# Altium PCB PCB1_V2.PcbDoc
Units mm, origin at the board's own origin, x right, y up, seen from the top; angles counter-clockwise.
Board outline 152.4 x 101.6 mm, 2 copper layers (Top Layer, Bottom Layer); 82 components, 54 nets, 386 pads, 0 vias.
Unrouted connection lines stored in the file: 212.
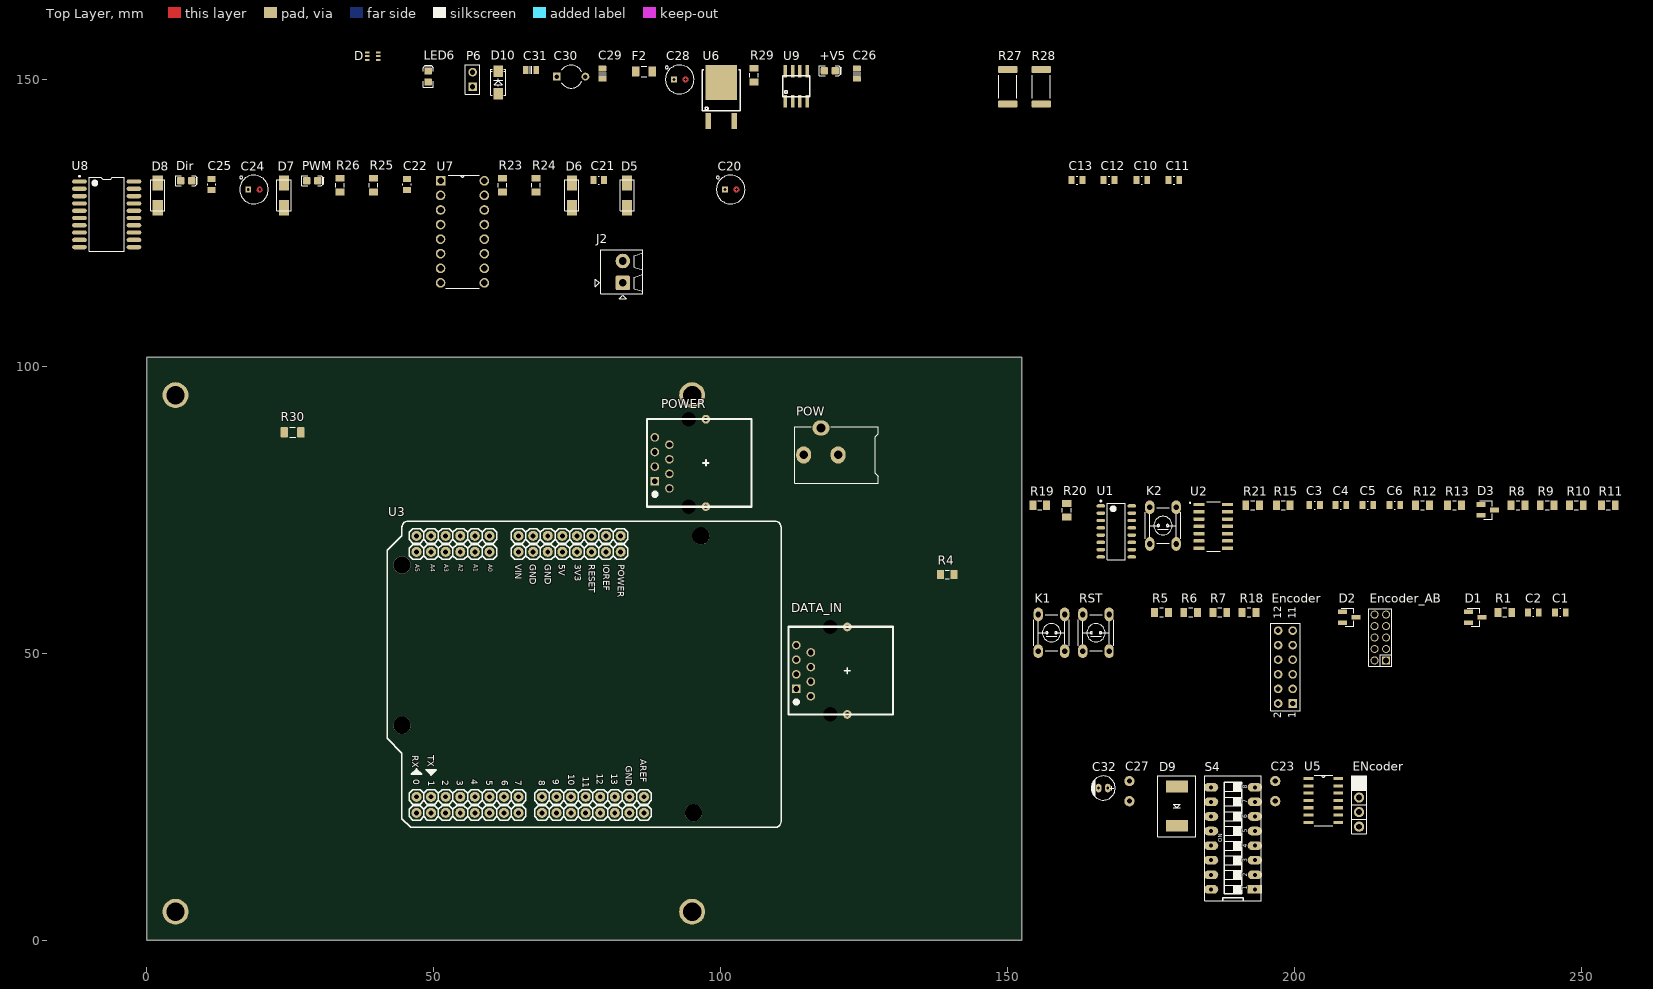
[diagram p0: Top Layer view]
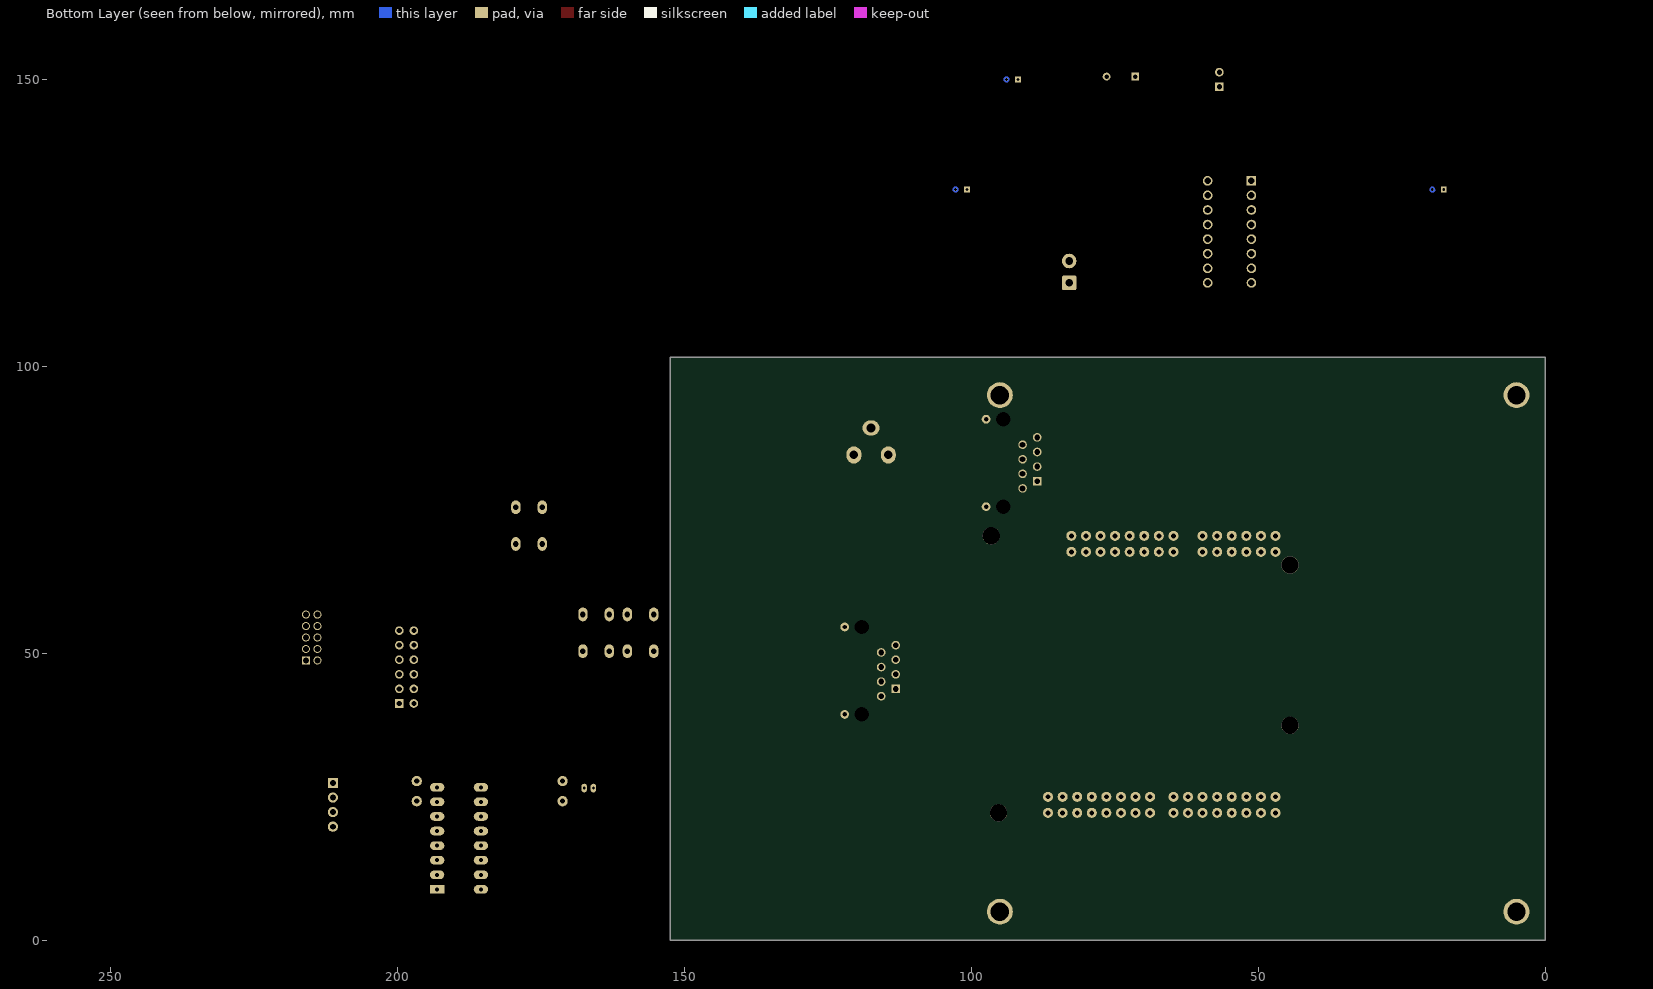
[diagram p1: Bottom Layer view, seen from below]

## Layer stack, top to bottom
Top Solder: solder mask 0.0102, Solder Resist, Dk 3.5
Top Layer: signal copper 0.0356
Dielectric 1: dielectric 0.32, FR-4, Dk 4.8
Bottom Layer: signal copper 0.0356
Bottom Solder: solder mask 0.0102, Solder Resist, Dk 3.5

## Board outline
0,0 152.4,0 152.4,101.6 0,101.6

## Design rules (kind name [scope] priority, off if disabled: settings)
Clearance [All] p1: gap=0.254 ignorepadtopadclearanceinfootprint=FALSE except(0: Arc-Hole Track-Hole SMDPad-Hole THPad-Hole Via-Hole Fill-Hole Poly-Hole Region-Hole Text-Hole)
PolygonConnect [All] p1: connectstyle=Relief reliefconductorwidth=0.254 reliefentries=4 polygonreliefangle="90 Angle" airgapwidth=0.254
RoutingVias [All] p1: holewidth=0.711 width=1.27 viastyle="Through Hole" minholewidth=0.711 minwidth=1.27 maxholewidth=0.711 maxwidth=1.27
SolderMaskExpansion [All] p1: expansion=0.102 istentingtop=FALSE
Width [All] p1: maxlimit=0.254 minlimit=0.254 preferedwidth=0.254
30 further rules are at their usual default settings.

## Components (designator, comment, footprint, x,y, rotation, side; value= is the part's Value field where it differs from the comment)
+V5 "Red" LED-0805-K 118.999,151.511 r0 top
C1 "470nF 50V" 0805#1 246.253,57.15 r0 top value=470nF
C2 "100nF" 0805#1 241.554,57.15 r0 top value=470nF
C3 "22pF" 0805#1 203.454,75.819 r0 top value=470nF
C4 "22pF" 0805#1 208.026,75.819 r0 top value=470nF
C5 "22pF" 0805#1 212.725,75.819 r0 top value=470nF
C6 "22pF" 0805#1 217.424,75.819 r0 top value=470nF
C10 "1uF" 0805#1 173.355,132.461 r0 top value=470nF
C11 "1uF" 0805#1 178.943,132.461 r0 top value=470nF
C12 "22pF" 0805#1 167.64,132.461 r0 top value=470nF
C13 "100nF" 0805#1 162.052,132.461 r0 top value=470nF
C20 "1000u" "RADIAL - THRU 5mm" 101.727,130.81 r0 top
C21 "470nF 50V" 0805#1 78.74,132.461 r0 top value=470nF
C22 "22nF 50V" 0805#1 45.339,131.699 r90 top value=470nF
C23 "100nF" "CAP Ceramic 3.5mm" 196.596,24.257 r90 top
C24 "1000u" "RADIAL - THRU 5mm" 18.669,130.81 r0 top
C25 "470nF 50V" 0805#1 11.303,131.699 r90 top value=470nF
C26 "approved sub OK" CAPC2012X135N 123.698,151.003 r90 top value=0.1µ
C27 "330pF" "CAP Ceramic 3.5mm" 171.196,24.257 r90 top
C28 "1000u" "RADIAL - THRU 5mm" 92.837,149.987 r0 top
C29 "approved sub OK" CAPC2012X135N 79.375,151.003 r90 top value=1n8
C30 "0.1uF" CAPR5-4X5 73.914,150.495 r0 top
C31 "approved sub OK" CAPC2012X135N 66.929,151.638 r0 top value=0.1µ
C32 "0.3uF" "cap 00" 166.624,26.543 r0 top
D "SMF05C.TCT" SC70-6 39.37,154.051 r90 top
D1 "SM712" PCBComponent_1 230.251,55.372 r0 top
D2 "SM712" PCBComponent_1 208.28,55.372 r0 top
D3 "SM712" PCBComponent_1 232.41,74.041 r0 top
D5 "40V 3A" DO-214AC#1 83.693,129.794 r90 top
D6 "40V 3A" DO-214AC#1 74.041,129.794 r90 top
D7 "40V 3A" DO-214AC#1 23.876,129.794 r90 top
D8 "40V 3A" DO-214AC#1 1.905,129.794 r90 top
D9 "SMCJ120CA" DIODE-SMC 179.451,27.305 r90 top
D10 "Diode 1N5819" DO-214AC#2 61.214,149.479 r90 top
DATA_IN "215877-1 RJ45" rj45 127.508,46.99 r0 top
Dir "Green" LED-0805-K 6.858,132.334 r0 top
ENcoder "Encoder_Motor" HEADER-1X4 211.201,27.432 r0 top
Encoder "Encoder" HDR2X6 199.644,41.275 r90 top
Encoder_AB "Encoder motor_AB" hhh 215.9,48.768 r90 top
F2 "Slow-blow" RESC3216X70N 86.614,151.384 r0 top value=2A
J2 "Stackable ScrewTerm" 2P_PCB_ScrewTerm_90S_3.81MM 82.931,114.554 r0 top value="2 position"
K1 "Switch PB 4Pin" SW_PB_THT_4PIN_SPDT_6X6X7 157.607,53.594 r90 top
K2 "Switch PB 4Pin" SW_PB_THT_4PIN_SPDT_6X6X7 177.038,72.263 r90 top
LED6 "Red" LED-0805-K 49.022,150.495 r90 top
P6 "Header 2" HDR1X2 56.769,148.717 r90 top
POW "CONN_PWR_JACK_2.1x5.5mm" CONN_PWR_JACK_2.1x5.5mm 128.143,84.582 r270 top value="2.1mm ID, 5.5mm OD"
POWER "215877-1 RJ45" rj45 102.87,83.185 r0 top
PWM "Green" LED-0805-K 28.829,132.334 r0 top
R1 "330" 0805#2 236.601,57.15 r0 top
R4 "1K" 0805#2 139.446,63.754 r0 top
R5 "1K" 0805#2 176.784,57.15 r0 top
R6 "1K" 0805#2 181.864,57.15 r0 top
R7 "1K" 0805#2 186.944,57.15 r0 top
R8 "120" 0805#2 238.887,75.819 r0 top
R9 "120" 0805#2 243.967,75.819 r0 top
R10 "120" 0805#2 249.047,75.819 r0 top
R11 "10K" 0805#2 254.635,75.819 r0 top
R12 "R0" 0805#2 222.25,75.819 r0 top
R13 "R0" 0805#2 227.838,75.819 r0 top
R15 "10K" 0805#2 197.993,75.819 r0 top
R18 "10K" 0805#2 192.024,57.15 r0 top
R19 "10K" 0805#2 155.575,75.819 r0 top
R20 "10K" 0805#2 160.274,74.93 r90 top
R21 "10K" 0805#2 192.659,75.819 r0 top
R23 "10K" 0805#2 61.976,131.572 r90 top
R24 "10K" 0805#2 67.818,131.572 r90 top
R25 "330" 0805#2 39.497,131.572 r90 top
R26 "330" 0805#2 33.655,131.572 r90 top
R27 "Thick Film" RESC6332X70N 149.987,148.717 r90 top value=R330
R28 "Thick Film" RESC6332X70N 155.829,148.717 r90 top value=R330
R29 "330" 0805#2 105.791,150.749 r90 top
R30 "Thin Film" RESC3216X70N 25.4,88.519 r0 top value=4.7K
RST "Switch PB 4Pin" SW_PB_THT_4PIN_SPDT_6X6X7 165.354,53.594 r90 top
S4 "DIP8" "DIP Switch x8" 193.04,8.89 r90 top
U1 "AM26LS32ACD" SOIC127P600X175-16N 168.91,71.247 r0 top
U2 "SN74LS14DR" SOIC127P600X175-14N#1 185.801,72.136 r0 top
U3 "ARDUINO UNO" Ardu_Uno 96.52,70.485 r180 top
U5 "74HC04D,653" SOIC127P600X175-14N#2 204.978,24.384 r0 top
U6 "L7805CD2T-TR" TO-252 102.362,142.748 r90 top
U7 "L293N" DIP254P762X508-16 58.801,114.554 r0 top
U8 "74HC541D" SOIC20-1 -6.985,126.492 r0 top
U9 "ACS712" ACS712 111.252,146.177 r90 top

## Footprints (in the part's own frame and the unit in brackets; to place one, negate y for a bottom-side part, rotate by r counter-clockwise, add the part's x,y. Pads: shape width x height; smd on the part's side, far side on the other; paste and mask are expansions set on the pad)
2P_PCB_ScrewTerm_90S_3.81MM [mil] "TERM BLOCK 2POS SIDE ENT STACKABLE 3.81MM"
  rrect25% 100x100 hole 52: 1(0,0)
  round 100 hole 52: 2(0,150)
  silkscreen extent -188,-110 136,226, body extent -152,-75 136,225, height 335
0805#1 [mil]
  rect 40x55 smd: 1(-37,0) 2(37,0)
  silkscreen extent -4,-28 4,28, body extent -47,-28 47,28, height 24
0805#2 [mil] "1K-0.125W"
  rect 47.24x62.99 smd: 1(-47.24,0) 2(47.24,0)
  silkscreen extent -13,-30 13,30
ACS712 [mil]
  rect 87x24 smd: 1(0,0) 2(0,-50) 3(0,-100) 4(0,-150) 5(206,-150) 6(206,-100) 7(206,-50) 8(206,0)
  silkscreen extent 32,-168 174,18
Ardu_Uno [mm]
  round 1.75 hole 0.85: 1(27.686,45.466) 1(27.686,48.26) 2(25.146,45.466) 2(25.146,48.26) 3(22.606,45.466) 3(22.606,48.26) 4(20.066,45.466) 4(20.066,48.26) 5(17.526,45.466) 5(17.526,48.26) 6(14.986,45.466) 6(14.986,48.26) 7(12.446,45.466) 7(12.446,48.26) 8(9.906,45.466) 8(9.906,48.26) 11(49.53,45.466) 11(49.53,48.26) 12(46.99,45.466) 12(46.99,48.26) 13(44.45,45.466) 13(44.45,48.26) 14(41.91,45.466) 14(41.91,48.26) 15(39.37,45.466) 15(39.37,48.26) 16(36.83,45.466) 16(36.83,48.26) 17(34.29,45.466) 17(34.29,48.26) 18(31.75,45.466) 18(31.75,48.26) 19(36.83,0) 19(36.83,2.794) 20(39.37,0) 20(39.37,2.794) 21(41.91,0) 21(41.91,2.794) 22(44.45,0) 22(44.45,2.794) 23(46.99,0) 23(46.99,2.794) 24(49.53,0) 24(49.53,2.794) 25(13.97,0) 25(13.97,2.794) 26(16.51,0) 26(16.51,2.794) 27(19.05,0) 27(19.05,2.794) 28(21.59,0) 28(21.59,2.794) 29(24.13,0) 29(24.13,2.794) 30(26.67,0) 30(26.67,2.794) 31(29.21,0) 31(29.21,2.794) 32(31.75,0) 32(31.75,2.794)
  round 3 hole 3 unplated: ""(0,0) ""(1.27,48.26) ""(52.07,5.08) ""(52.07,33.02)
  silkscreen extent -13.97,-2.54 54.61,50.8
"cap 00" [mm]
  oval 1x1.5 hole 0.5: 1(0.8,0) 2(-0.8,0)
  silkscreen extent -2.1,-2.1 2.1,2.1
"CAP Ceramic 3.5mm" [mm] "Bipolar Capacitor-Design:Ali Hafizi"
  round 1.8 hole 0.9: 1(0,0) 2(3.5,0)
CAPC2012X135N [mm] "Chip Capacitor, Body 2.0x1.2mm, EIA 0805, IPC Medium Density"
  round 0.254 on Mech15: 0(0,0)
  rrect25% 1x1.4 smd: 1(-0.9,0) 2(0.9,0)
  Top Layer pour cut-out: -0.675,0.7 -0.475,0.9 0.475,0.9 0.675,0.7 0.675,-0.7 0.475,-0.9 -0.475,-0.9 -0.675,-0.7
  silkscreen extent -0.15,-0.65 0.15,0.65, body extent -1.1,-0.72 1.1,0.73, height 1.34
CAPR5-4X5 [mm] "Capacitor; 2 Leads"
  rect 1.35x1.35 hole 0.8: 1(-2.5,0)
  round 1.35 hole 0.8: 2(2.5,0)
  silkscreen extent -1.69,-2 1.82,2
CONN_PWR_JACK_2.1x5.5mm [mm] "Power Connector, 2.1mm ID, 5.5mm OD"
  oval 3x2.6 hole 1.511: 1(0,-13.7) 2(0,-7.7)
  oval 2.6x3 hole 1.511: 3(-4.7,-10.7)
  silkscreen extent -4.9,-15.22 4.92,-0.7, body extent -4.9,-14.1 4.5,0, height 11
DIODE-SMC [mil]
  rect 80x150 smd: A(-19.68,0) K(-288.74,0)
  silkscreen extent -365,-130 55,130, body extent -309,-118 2,118, height 84
DIP254P762X508-16 [mil]
  rect 66x66 hole 44: 1(-300,700)
  round 66 hole 44: 2(-300,600) 3(-300,500) 4(-300,400) 5(-300,300) 6(-300,200) 7(-300,100) 8(-300,0) 9(0,0) 10(0,100) 11(0,200) 12(0,300) 13(0,400) 14(0,500) 15(0,600) 16(0,700)
  silkscreen extent -265,-38 -35,738
"DIP Switch x8" [mm] "Switch DIP 8 way flat slide Thru-Hole-Design:Ali Hafizi"
  rect 1.5x2.5 hole 0.7: 1(0,0)
  oval 1.5x2.5 hole 0.7: 2(2.54,-0.01) 3(5.08,0) 4(7.62,0) 5(10.16,0) 6(12.7,0) 7(15.24,0) 8(17.78,0) 9(17.78,7.62) 10(15.24,7.62) 11(12.7,7.62) 12(10.16,7.62) 13(7.62,7.62) 14(5.08,7.62) 15(2.54,7.62) 16(0,7.62)
  silkscreen extent -1.98,-1.14 19.76,8.76, body extent -1.98,-1.14 19.76,8.76, height 6.35
DO-214AC#1 [mm]
  rect 2.65x1.75 smd: A(-2.15,0) C(2.15,0)
  silkscreen extent -2.7,-1.25 2.7,1.25
DO-214AC#2 [mm] "DO-214AC(SMA) Package"
  rect 2x1.7 smd: 1(-1.965,0) 2(1.965,0)
  silkscreen extent -2.25,-1.3 2.25,1.3, body extent -2.76,-1.4 2.74,1.4, height 2.6
HDR1X2 [mm] "Connector; Header; 2 Position"
  rect 1.5x1.5 hole 0.9: 1(0,0)
  round 1.5 hole 0.9: 2(2.54,0)
  silkscreen extent -1.27,-1.27 3.81,1.27
HDR2X6 [mm] "Connector; Header; 6x2 Position"
  rect 1.5x1.5 hole 0.9: 1(0,0)
  round 1.5 hole 0.9: 2(0,2.54) 3(2.54,0) 4(2.54,2.54) 5(5.08,0) 6(5.08,2.54) 7(7.62,0) 8(7.62,2.54) 9(10.16,0) 10(10.16,2.54) 11(12.7,0) 12(12.7,2.54)
  silkscreen extent -1.27,-1.27 13.97,3.81
HEADER-1X4 [mil]
  rect 70x70 hole 40: 1(0,0)
  round 70 hole 40: 2(0,-100) 3(0,-200) 4(0,-300)
  silkscreen extent -51,-350 50,50, body extent -50,-350 50,50, height 470
hhh [mm]
  rect 1.4x1.4 hole 1: 1(0,0)
  round 1.4 hole 1: 2(0,2) 3(2,0) 4(2,2) 5(4,0) 6(4,2) 7(6,0) 8(6,2) 9(8,0) 10(8,2)
  silkscreen extent -1,-1 9,3
LED-0805-K [mil]
  round 20 on Mech15: 0(0,0)
  rrect25% 50x50 smd: A(-37.5,0) K(37.5,0)
  Top Layer pour cut-out: -15,30 15,30 15,-30 -15,-30
  silkscreen extent -72,-35 77,35, body extent -39,-25 39,25, height 31
PCBComponent_1 [mil]
  rect 61.42x31.5 smd: 1(0,74.8) 2(0,0) 3(94.48,37.4)
  silkscreen extent -8,-25 77,100
"RADIAL - THRU 5mm" [mm] "Through Hole"
  rect 1.008x1.008 hole 0.5: NEG(-1,0)
  round 0.5 hole 0.5: POS(1,0)
  Top Layer region: 1.474,0.172 1.213,0.457 0.828,0.474 0.543,0.213 0.526,-0.172 0.787,-0.457 1.172,-0.474 1.457,-0.213
  Bottom Layer region: 1.474,0.172 1.213,0.457 0.828,0.474 0.543,0.213 0.526,-0.172 0.787,-0.457 1.172,-0.474 1.457,-0.213
  Multi-Layer region: 1.474,0.172 1.213,0.457 0.828,0.474 0.543,0.213 0.526,-0.172 0.787,-0.457 1.172,-0.474 1.457,-0.213
  silkscreen extent -2.5,-2.5 2.5,2.5
RESC3216X70N [mm] "Chip Resistor, Body 3.2x1.6mm, EIA 1206, IPC Medium Density"
  round 0.508 on Mech15: 0(0,0)
  rrect25% 1.3x1.8 smd: 1(-1.45,0) 2(1.45,0)
  silkscreen extent -0.51,-0.89 0.51,0.89, body extent -1.62,-0.82 1.63,0.83, height 0.69
RESC6332X70N [mm] "Chip Resistor, Body 6.3x3.2mm, 2512, IPC Medium Density"
  round 1 on Mech15: 0(0,0)
  rrect25% 1.25x3.35 smd: 1(-3,0) 2(3,0)
  silkscreen extent -2,-1.58 2,1.58, body extent -3.3,-1.7 3.3,1.7, height 0.69
rj45 [mm]
  rect 1.5x1.5 hole 1: 1(-14.361,-3.175)
  round 1.5 hole 1: 2(-11.821,-4.445) 3(-14.361,-0.635) 4(-11.821,-1.905) 5(-14.361,1.905) 6(-11.821,0.635) 7(-14.361,4.445) 8(-11.821,3.175)
  round 1.524 hole 0.762: 17(-5.461,-7.62) 17(-5.461,7.616)
  rect 0x0 hole 2.5 unplated: ""(-8.461,-7.62) ""(-8.461,7.616)
  silkscreen extent -15.76,-7.7 2.54,7.7, body extent -15.65,-7.59 2.45,7.61, height 11.55
SC70-6 [mm]
  rect 0.35x0.8 smd paste-1 mask+0: 1(-0.65,-0.95) 2(0,-0.95) 3(0.65,-0.95) 4(0.65,0.95) 5(0,0.95) 6(-0.65,0.95)
SOIC20-1 [mm]
  oval 2.55x0.75 smd: 1(-4.75,5.715) 2(-4.75,4.445) 3(-4.75,3.175) 4(-4.75,1.905) 5(-4.75,0.635) 6(-4.75,-0.635) 7(-4.75,-1.905) 8(-4.75,-3.175) 9(-4.75,-4.445) 10(-4.75,-5.715) 11(4.75,-5.715) 12(4.75,-4.445) 13(4.75,-3.175) 14(4.75,-1.905) 15(4.75,-0.635) 16(4.75,0.635) 17(4.75,1.905) 18(4.75,3.175) 19(4.75,4.445) 20(4.75,5.715)
  silkscreen extent -4.87,-6.45 3.08,6.76, body extent -3.8,-6.45 3.8,6.45, height 2.65
SOIC127P600X175-14N#1 [mm]
  rrect50% 1.97x0.6 smd: 1(-2.475,3.81) 2(-2.475,2.54) 3(-2.475,1.27) 4(-2.475,0) 5(-2.475,-1.27) 6(-2.475,-2.54) 7(-2.475,-3.81) 8(2.475,-3.81) 9(2.475,-2.54) 10(2.475,-1.27) 11(2.475,0) 12(2.475,1.27) 13(2.475,2.54) 14(2.475,3.81)
  silkscreen extent -4.15,-4.33 1.17,4.33
SOIC127P600X175-14N#2 [mm]
  rect 1.702x0.533 smd: 1(-2.591,3.81) 2(-2.591,2.54) 3(-2.591,1.27) 4(-2.591,0) 5(-2.591,-1.27) 6(-2.591,-2.54) 7(-2.591,-3.81) 8(2.591,-3.81) 9(2.591,-2.54) 10(2.591,-1.27) 11(2.591,0) 12(2.591,1.27) 13(2.591,2.54) 14(2.591,3.81)
  silkscreen extent -1.6,-4.37 1.6,4.37, body extent -3,-4.33 3,4.33, height 1.75
SOIC127P600X175-16N [mm] "SOIC, 16-Leads, Body 9.90x3.90mm, Pitch 1.27mm, IPC Medium Density"
  oval 1.5x0.6 smd: 1(-2.7,4.445) 2(-2.7,3.175) 3(-2.7,1.905) 4(-2.7,0.635) 5(-2.7,-0.635) 6(-2.7,-1.905) 7(-2.7,-3.175) 8(-2.7,-4.445) 9(2.7,-4.445) 10(2.7,-3.175) 11(2.7,-1.905) 12(2.7,-0.635) 13(2.7,0.635) 14(2.7,1.905) 15(2.7,3.175) 16(2.7,4.445)
  silkscreen extent -2.82,-4.95 1.55,5.42, body extent -1.95,-4.95 1.95,4.95, height 1.75
SW_PB_THT_4PIN_SPDT_6X6X7 [mm] "SWITCH, PUSHBUTTON, THD, SPDT, 6X6X7.0 mm Height ; 1,000,000 cycles ; 0.98N Force, SKHHBVA010"
  oval 2.4x1.6 hole 1 mask+0.1: 1(-3.2,2.3) 2(-3.2,-2.3) 3(3.2,-2.3) 4(3.2,2.3)
  silkscreen extent -3.1,-3.1 3.1,3.1, body extent -3.95,-3.1 3.95,3.1, height 7.03
TO-252 [mil]
  rect 108x39 smd: 1(0,180) 3(0,0)
  rect 242x219 smd: 4(264,90)
  silkscreen extent 71,-40 351,220

## Part data
+V5 LED6: library part LED_SMD_Red_0805_6mcd, "LED 0805 SMD Red 6mcd 621nm", Manufacturer 1="Lite-On Inc", Manufacturer Part Number 1=LTST-C171EKT, Package / Case=0805, Ratings="6 mcd; 621 nm", Supplier Part Number 1=160-1422-1-ND, Color=Red, Material="GaAsP on GaP", SCDType=source, Supplier 1=Digi-Key
C1 C2 C3 C4 C5 C6 C10 C11 C12 C13 C21 C22 C25: library part "CAP 470nF 50V", "CAP CER 0.1UF 50V X7R 0805", Package=0805, Rating=50V, Tolerance=10%
C20 C24 C28: library part "CAP POL 1000uF TH", "NICHICON   UVR1E102MPD1TD   ALUMINUM ELECTROLYTIC CAPACITOR, 1000UF, 25V, 20%, RADIAL, FULL REEL", Capacitance=1mF, Case/Package=Radial, Dielectric Material=Aluminium, Leakage Current=750uA, Manufacturer=Nichicon, Manufacturer Part Number=UVR1E102MPD1TD, Max Operating Temperature=85°C, Min Operating Temperature=-40°C, Package Quantity=500, Ripple Current=960mA, Supplier Part Number 1=493-5913-1-ND, Tolerance=20%, Voltage=25V, Category="Aluminum Electrolytic Capacitors", ComponentLink1Description=https://datasheet.ciiva.com/7851/e-vr-7851718.pdf?src-supplier=Element14, ComponentLink1URL=https://datasheet.ciiva.com/7851/e-vr-7851718.pdf?src-supplier=Element14, ComponentLink2Description=https://datasheet.ciiva.com/6300/e-vr-6300009.pdf?src-supplier=Digi-Key, ComponentLink2URL=https://datasheet.ciiva.com/6300/e-vr-6300009.pdf?src-supplier=Digi-Key, ComponentLink3Description=https://datasheet.ciiva.com/6300/e-vr-6300010.pdf?src-supplier=Digi-Key, ComponentLink3URL=https://datasheet.ciiva.com/6300/e-vr-6300010.pdf?src-supplier=Digi-Key, ComponentLink4Description=https://datasheet.ciiva.com/11684/e-vr-11684106.pdf?src-supplier=Avnet, ComponentLink4URL=https://datasheet.ciiva.com/11684/e-vr-11684106.pdf?src-supplier=Avnet, ComponentLink5Description=https://datasheet.ciiva.com/16502/e-vr-16502813.pdf?src-supplier=Future+Electronics, ComponentLink5URL=https://datasheet.ciiva.com/16502/e-vr-16502813.pdf?src-supplier=Future+Electronics, ComponentLink6Description=https://datasheet.ciiva.com/46381/1909356-46381757.pdf?src-supplier=Element14, ComponentLink6URL=https://datasheet.ciiva.com/46381/1909356-46381757.pdf?src-supplier=Element14, Diameter=10mm, Dissipation Factor=0.16%, Height=20mm, Height - Seated (Max)=0.866inch, Lead Diameter=0.6mm, Lead Free="Lead Free", Lead Pitch=5mm, Length=20mm, Life (Hours)=2000Hour, Mount="Through Hole,PCB", Number of Pins=2, Packaging="Tape and Reel", Pricing 1="1=0.58000, 10=0.40800, 100=0.26890 (USD)", Radiation Hardening=No, REACH SVHC="No SVHC", RoHS=Yes, Stock 1=43448, Supplier 1=Digi-Key, Termination=Radial, Voltage Rating=25V, Voltage Rating (DC)=25V
C23 C27: library part "CAP CERAMIC TOTAL SIZE", "CAP Ceramic Total", Designer="Ali Hafizi"
C26 C31: library part CAPC_1u_0805_X7R_16V_10%, "Capacitor SMD Cer 1uF 10% 16V X7R 0805", Manufacturer 1=Yageo, Manufacturer 2=Kemet, Manufacturer 3="Samsung Electro-Mechanics America, Inc", Manufacturer 4="TDK Corporation", Manufacturer Part Number 1=CC0805KKX7R7BB105, Manufacturer Part Number 2=C0805C105K4RACTU, Manufacturer Part Number 3=CL21B105KOFNNNE, Manufacturer Part Number 4=C2012X7R1C105K125AA, Package / Case="0805 (2012 metric)", Ratings="16V; X7R", Supplier Part Number 1=311-1365-6-ND, Temperature Coefficient=X7R, Tolerance=±10%, ComponentLink1Description=http://www.yageo.com/documents/recent/UPY-GPHC_X7R_6.3V-to-50V_8.pdf, ComponentLink1URL=http://www.yageo.com/documents/recent/UPY-GPHC_X7R_6.3V-to-50V_8.pdf, ComponentLink2Description=http://www.kemet.com/datasheets&C0805C105K4RACTU, ComponentLink2URL=http://www.kemet.com/datasheets&C0805C105K4RACTU, ComponentLink3Description=http://www.samsungsem.com/servlet/FileDownload?type=spec&file=CL21B105KOFNNNE.pdf, ComponentLink3URL=http://www.samsungsem.com/servlet/FileDownload?type=spec&file=CL21B105KOFNNNE.pdf, ComponentLink4Description=http://product.tdk.com/capacitor/mlcc/en/documents/mlcc_commercial_general_en.pdf, ComponentLink4URL=http://product.tdk.com/capacitor/mlcc/en/documents/mlcc_commercial_general_en.pdf, Material=ceramic, RoHS 1="RoHS Compliant", RoHS 2="RoHS Compliant", RoHS 3="RoHS Compliant", RoHS 4="RoHS Compliant", SCDType=spec, Supplier 1=Digi-Key, Supplier 2=Digi-Key, Supplier 3=Digi-Key, Supplier 4=Digi-Key, Supplier Part Number 2=399-1284-6-ND, Supplier Part Number 3=1276-1026-6-ND, Supplier Part Number 4=445-1358-6-ND
C29: library part CAPC_1n8_50V_0805, "Capacitor SMD Cer 1.8nF 10% 50V X7R 0805", Manufacturer 1="AVX Corporation", Manufacturer Part Number 1=08055C182KAT2A, Operating Temperature="-55°C ~ 125°C", Package / Case="0805 (2012 metric)", Ratings="50V; X7R", Supplier Part Number 1=478-1374-1-ND, Tolerance=±10%, SCDType=source*, Supplier 1=Digi-Key
C30 C32: library part Cap-Polar, "Polar Capacitor", Voltage=35V, Adding Date=1387/12/20, Designer="Saeid Jorablo", Organazation=ControTec
D: "12.5V Clamp 8A _8/20Âµs_ Ipp Tvs Diode Surface Mount SC-70-6", Package="SOT-363 Diodes Inc.", Availability=Unavailable, MF=Semtech, MP=SMF05C.TCT, Price=None, SnapEDA_Link=https://www.snapeda.com/parts/SMF05C.TCT/Semtech%20Corporation/view-part/1264306/?ref=snap
D1 D2 D3: library part SM712.TC, "Asymmetrical TVS Diode for  Extended Common-Mode RS-485", Manufacturer=SEMTECH, Operating Temp="-55 to 125 °C", Storage Temp="-55 to 150 °C", Manufacture Part #=SM712.TC
D5 D6 D7 D8: library part "DIODE SCHOTTKY 40V 3A", "Diode Schottky 40V 3A Surface Mount SMA", Current - Average Rectified (Io)=3A, Package=DO-214AC, Voltage - DC Reverse (Vr) (Max)=40V, Voltage - Forward (Vf) (Max) @ If="450mV @ 3A", ComponentLink1Description=digikey, ComponentLink1URL=https://www.digikey.ca/product-detail/en/on-semiconductor/MBR0540T1G/MBR0540T1GOSCT-ND/917967
D9: "Transient Surpression Diode TVS", Supplier Part Number 1=SMCJ120CABTR-ND, Supplier 1=Digi-Key
D10: "SS14", ComponentLink1Description="Manufacturer Link", ComponentLink1URL=http://www.irf.com/
DATA_IN POWER: "Female Header, Pitch 2.54 mm, 2 x 4 Position, Height 11.5 mm, Tail Length 3 mm, -40 to 105 degC, RoHS, Tape and Reel", LED Color="Does Not Contain LED", Ratings=Cat3, Standard Package=1, Supplier Part Number 1=A105009TR-ND, 3D Model=215877-1.pdf, Category="Connectors, Interconnects", ComponentLink1Description="Manufacturer URL", ComponentLink1URL=http://www.te.com, ComponentLink2Description=Datasheet, ComponentLink2URL=https://datasheet.ciiva.com/16310/215877-1-16310656.pdf, Connector Type=Jack, Contact Finish=Gold, Contact Material="Phosphor Bronze", DatasheetVersion="Rev. AE", Dynamic Catalog="Modular Jacks", Family="Modular Connectors - Jacks", Features="Board Lock", Housing Material="Polybutylene Terephthalate (PBT)", Mounting Type="Through Hole", Number of Ports=1, Number of Positions/Contacts="8p8c (RJ45, Ethernet)", Number of Rows=1, Orientation="90° Angle (Right)", Other Names=A105009CT, PackageReference=THD, Packaging="Cut Tape (CT)", RoHS Information="215877-1 Statement of Compliance", Shielding=Unshielded, Supplier 1=Digi-Key, Supplier 2=Digi-Key, Supplier Part Number 2=A105009CT-ND, Tab Direction=Down, Termination=Solder
Dir PWM: library part LED_SMD_Green_0805_6mcd, "LED, 0805 SMD, Green", Manufacturer 1=LITE-ON, Manufacturer Part Number 1=LTST-C171GKT, Package / Case=0805, Ratings="6 mcd; 569 nm", Supplier Part Number 1=160-1423-1-ND, Color=Green, Material=GaP, SCDType=source, Supplier 1=Digi-Key
ENcoder: library part HEADER-1X4, Supplier Part Number 1=S1011E-36-ND, Supplier 1=Digi-Key
Encoder: library part "Header 6X2", "Header, 6-Pin, Dual row", LatestRevisionDate=17-Jul-2002, LatestRevisionNote="Re-released for DXP Platform.", Publisher="Altium Limited"
Encoder_AB: library part "Header 5X2", "Header, 5-Pin, Dual row", LatestRevisionDate=17-Jul-2002, LatestRevisionNote="Re-released for DXP Platform.", Publisher="Altium Limited"
F2: library part FUSE_160mA_1206, "Fuse 160mA 63VDC 1206 SMD", Manufacturer 1="Holly Fuse", Manufacturer Part Number 1=12T-0160L, Package / Case="1206 (3216 metric)", Ratings="160mA; 63VDC; slow-blow", SCDType=spec
J2: library part 2P_ScrewTerm_90S_3.81MM, "Terminal Block Screw Type THT 2-Position 3.81mm pitch", Color=Black, Manufacturer 1="Tyco Electronics", Manufacturer Part Number 1=1776113-2, Package / Case="Side Entry; 3.81mm pitch", Supplier Part Number 1=Motor, Category="Connectors Interconnects", Pitch="0.150\" (3.81mm)", Positions Per Level=2, SCDType=undef, Supplier 1=Digi-Key
K1 K2 RST: library part SW-PB-4Pin, "Switch Push Button 4 Pin"
P6: "Header, 2-Pin", LatestRevisionDate=17-Jul-2002, LatestRevisionNote="Re-released for DXP Platform.", Publisher="Altium Limited"
POW: "Power Connector, THT, 2.1mm ID, 5.5mm OD", Manufacturer 1="CUI Inc", Manufacturer Part Number 1=PJ-102AH, Package / Case="PCB mount", Supplier Part Number 1=CP-102AH-ND, Category=Connectors, Mounting Type="Through Hole", SCDType=undef, Supplier 1=Digi-Key
R1 R4 R5 R6 R7 R8 R9 R10 R11 R12 R13 R15 R18 R19 R20 R21 R23 R24 R25 R26 R29: library part Resistor, "Resistor", Power="1/8 W", Tolerance=5%
R27 R28: library part RES_3K3_2512_5%, "Resistor SMD chip 3.3k Ohm 1W 5% 2512", Manufacturer 1=Vishay/Dale, Manufacturer Part Number 1=CRCW25123K30JNEG, Package / Case="2512 (6332 metric)", Ratings=1W, Supplier Part Number 1=541-3.3KXCT-ND, Tolerance=±5%, Material="Thick Film", SCDType=spec, Supplier 1=Digi-Key
R30: library part RES_91R_1206_5%, "Resistor SMD chip 91 Ohm 0.25W 5% 1206", Manufacturer 1=Yageo, Manufacturer Part Number 1=RC1206JR-0791RL, Package / Case="1206 (3216 Metric)", Ratings="1/4 W", Supplier Part Number 1=311-91ERCT-ND, Tolerance=±5%, ComponentLink1Description=http://www.yageo.com/documents/recent/PYu-RC1206_51_RoHS_L_4.pdf, ComponentLink1URL=http://www.yageo.com/documents/recent/PYu-RC1206_51_RoHS_L_4.pdf, Material="Thin Film", SCDType=spec, Supplier 1=Digi-Key
S4: library part "DIP Switch 8", "8 BIT DIP Switch"
U1: "Quadruple Differential Line Receivers 16-SOIC 0 to 70", Package="SOIC-16 Texas Instruments", Availability=Good, Check_prices=https://www.snapeda.com/parts/AM26LS32ACD/Texas%20Instruments/view-part/288238/?ref=eda, MF="Texas Instruments", MP=AM26LS32ACD, Price=None, Purchase-URL=https://pricing.snapeda.com/search/part/AM26LS32ACD/?ref=eda, SnapEDA_Link=https://www.snapeda.com/parts/AM26LS32ACD/Texas%20Instruments/view-part/288238/?ref=snap
U2: Package=None, Availability=Unavailable, MP=SN74LS14DR, Price=None
U5: "Inverter IC 6 Channel 14-SO", Package="SO14-14 Nexperia USA Inc.", Availability=Good, Check_prices=https://www.snapeda.com/parts/74HC04D,653/Nexperia/view-part/1784153/?ref=eda, MF="Nexperia USA", MP=74HC04D,653, Price=None, Purchase-URL=https://pricing.snapeda.com/search/part/74HC04D,653/?ref=eda, SnapEDA_Link=https://www.snapeda.com/parts/74HC04D,653/Nexperia/view-part/1784153/?ref=snap
U7: "Bipolar Motor Driver Bipolar Parallel 16-PDIP", Package="PDIP-16 Texas Instruments", Availability=Unavailable, MF="Texas Instruments", MP=L293N, Price=None, SnapEDA_Link=https://www.snapeda.com/parts/L293N/Texas%20Instruments/view-part/4503258/?ref=snap
U8: "Buffer, Non-Inverting 1 Element 8 Bit per Element 3-State Output 20-SOIC", Package="SOIC-20 Toshiba", Availability=Unavailable, MF="Toshiba Semiconductor", MP=74HC541D, Price=None, SnapEDA_Link=https://www.snapeda.com/parts/74HC541D/Toshiba%20Semiconductor%20and%20Storage/view-part/2887736/?ref=snap

## Free pads (board coordinates)
  round 4.5 hole 3.2: 2(5,95) 2(5.005,5) 2(95,5) 2(95,95)

## Nets (pads, with @x,y where several pads share a name; then routed paths per layer and width w, separated by ;. In a path a pad name is that pad's centre, name@x,y a point inside that pad or via, vN(x,y) a via of type N, cw(c..) or ccw(c..) an arc to the next point about the centre after c; other vN are vias at no path point)
1: C1.2 C2.2 C3.2 C4.2 C5.2 C6.2 C10.1 C11.1 C12.2 C13.2 C20.NEG C21.2 C22.2 C24.NEG C25.1 C26.1 C27.1 C28.NEG C29.2 C30.2 C31.2 C32.2 D1.3 D2.3 D3.3 D9.K D10.1 D.2 Encoder.1 ENcoder.1 Encoder.2 Encoder_AB.1 Encoder_AB.6 K1.3 K1.4 K2.3 K2.4 R12.1 R25.2 R26.2 R27.2 R28.2 R29.1 R30.2 RST.3 RST.4 U1.8 U2.7 U5.7 U6.4 U7.4 U7.5 U7.12 U7.13 U8.1 U8.10 U8.19 U9.3 U9.4 U9.5
1A: C10.2 D2.2 ENcoder.2 Encoder_AB.5 R15.1 R19.1 U2.1
2: D1.2 Encoder.3 Encoder.4 R4.1
2A: C11.2 D2.1 ENcoder.3 Encoder_AB.4 R11.1 R20.1 U2.3
3: D1.1 Encoder.5 Encoder.6 R5.1
4: D3.2 Encoder.7 Encoder.8 R6.1
5: D3.1 Encoder.9 Encoder.10 R7.2
6: +V5.A C1.1 C2.1 C12.1 C13.1 C21.1 C22.1 C24.POS C25.2 C26.2 DATA_IN.8 ENcoder.4 Encoder.11 Encoder.12 F2.2 R1.2 R10.2 R13.1 R18.1 R21.1 R23.2 R24.2 U1.16 U2.14 U5.14 U7.16 U8.20 U9.8
A+: C5.1 R6.2 R9.2 U1.1
A-: C6.1 R7.1 R9.1 U1.2
B+: C3.1 R4.2 R8.2 U1.7
B-: C4.1 R5.2 R8.1 U1.6
D: D.3 DATA_IN.6 P6.2 U8.2
Dir: Dir.A R23.1 S4.5 S4.7 U5.3 U5.5
Dir2: U5.6 U5.9
Dir_D: S4.10 U8.17
Dir_M: S4.12
En: U5.2 U7.1 U7.9
En_A: S4.13 U1.3
En_A_2: R19.2 S4.15 U2.2
En_A_COM: S4.2 S4.4 U8.4
En_A_out: D.4 DATA_IN.5 U8.16
En_B: S4.14 U1.5
En_B_2: R20.2 S4.16 U2.4
En_B_COM: S4.1 S4.3 U8.5
En_B_out: D.5 DATA_IN.4 U8.15
GND_M: D7.A D8.A R27.1 R28.1 U9.1 U9.2
I_motor: U9.7
K1: K1.1 K1.2 R18.2
K2: K2.1 K2.2 R21.2
M1: C23.2 D6.A D8.C J2.2 U7.3 U7.14
M2: C23.1 D5.A D7.C J2.1 U7.6 U7.11
Net+V5_K: +V5.K R29.2
NetC29_1: C29.1 U9.6
NetC31_1: C31.1 C32.1 F2.1 U6.3
NetD9_A: D9.A POW.2 POW.3 POWER.1 POWER.2 POWER.3 POWER.4
NetD10_2: D10.2 DATA_IN.1
NetDir_K: Dir.K R26.1
NetEncoder_AB_2: Encoder_AB.2 R1.1
NetEncoder_AB_3: Encoder_AB.3 R10.1
NetLED6_K: LED6.K R30.1
NetPWM_K: PWM.K R25.1
NetR12_2: R12.2 U1.4
NetR13_2: R13.2 U1.12
NetU5_4: U5.4 U7.2 U7.15
NetU5_8: U5.8 U7.7 U7.10
P: D.1 DATA_IN.7 P6.1 U8.3
Pwm: PWM.A R24.1 S4.6 S4.8 U5.1
Pwm_D: S4.9 U8.18
Pwm_M: S4.11
RST: RST.1 RST.2
SCL: DATA_IN.3
SDA: DATA_IN.2
Vm: C20.POS C27.2 C28.POS C30.1 D5.C D6.C LED6.A POW.1 POWER.5 POWER.6 POWER.7 POWER.8 U6.1 U7.8
pads on no net: +V5.0 C26.0 C29.0 C31.0 D.6 DATA_IN. DATA_IN.17 Dir.0 Encoder_AB.7 Encoder_AB.8 Encoder_AB.9 Encoder_AB.10 F2.0 LED6.0 POWER. POWER.17 PWM.0 R11.2 R15.2 R27.0 R28.0 R30.0 U1.9 U1.10 U1.11 U1.13 U1.14 U1.15 U2.5 U2.6 U2.8 U2.9 U2.10 U2.11 U2.12 U2.13 U3. U3.1 U3.2 U3.3 U3.4 U3.5 U3.6 U3.7 U3.8 U3.11 U3.12 U3.13 U3.14 U3.15 U3.16 U3.17 U3.18 U3.19 U3.20 U3.21 U3.22 U3.23 U3.24 U3.25 U3.26 U3.27 U3.28 U3.29 U3.30 U3.31 U3.32 U5.10 U5.11 U5.12 U5.13 U8.6 U8.7 U8.8 U8.9 U8.11 U8.12 U8.13 U8.14

## Silkscreen, mask and mechanical layers (free items; w line width, h text height)
Mechanical 1:
  lines w0.5: 0,0 100,0 100,99.949 0,99.949 0,0

## Text inside footprints (layer, text, board x,y; h text height)
D1: Mechanical 15 "Q3" at 231.701,55.922 h0.5 r90
D2: Mechanical 15 "Q3" at 209.73,55.922 h0.5 r90
D3: Mechanical 15 "Q3" at 233.86,74.591 h0.5 r90
Encoder: Top Overlay "12" at 197.612,56.007 h1.27 r90; Top Overlay "1" at 200.152,57.023 h1.27 r90; Top Overlay "1" at 200.152,56.007 h1.27 r90; Top Overlay "1" at 200.152,38.735 h1.27 r90; Top Overlay "2" at 197.612,38.735 h1.27 r90
S4: Top Overlay "ON" at 187.39,17.12 h0.7 r90; Top Overlay "1" at 191.745,8.789 h0.76 r90; Top Overlay "2" at 191.745,11.053 h0.76 r90; Top Overlay "3" at 191.745,13.613 h0.76 r90; Top Overlay "4" at 191.745,16.174 h0.76 r90; Top Overlay "5" at 191.745,18.734 h0.76 r90; Top Overlay "6" at 191.745,21.295 h0.76 r90; Top Overlay "7" at 191.745,23.855 h0.76 r90; Top Overlay "8" at 191.745,26.416 h0.76 r90
U3: Top Overlay "GND" at 69.367,65.507 h1.17 r270; Top Overlay "POWER" at 82.123,65.504 h1.17 r269; Top Overlay "IOREF" at 79.553,65.507 h1.17 r270; Top Overlay "0" at 46.38,28.042 h1.17 r270; Top Overlay "1" at 49.047,27.788 h1.17 r270; Top Overlay "2" at 51.486,27.94 h1.17 r270; Top Overlay "3" at 54.026,27.94 h1.17 r270; Top Overlay "4" at 56.54,28.042 h1.17 r270; Top Overlay "5" at 59.106,27.94 h1.17 r270; Top Overlay "6" at 61.874,27.915 h1.17 r270; Top Overlay "7" at 64.16,27.915 h1.17 r270; Top Overlay "8" at 68.25,27.94 h1.17 r270; Top Overlay "9" at 70.764,28.042 h1.17 r270; Top Overlay "10" at 73.431,28.931 h1.17 r270; Top Overlay "11" at 75.971,28.55 h1.17 r270; Top Overlay "12" at 78.384,29.058 h1.17 r270; Top Overlay "13" at 80.924,29.058 h1.17 r270; Top Overlay "GND" at 66.7,65.507 h1.17 r270; Top Overlay "VIN" at 64.16,65.507 h1.17 r270; Top Overlay "A5" at 46.761,65.507 h0.76 r270; Top Overlay "A4" at 49.428,65.507 h0.76 r270; Top Overlay "A3" at 51.841,65.507 h0.76 r270; Top Overlay "A2" at 54.381,65.507 h0.76 r270; Top Overlay "A1" at 56.921,65.507 h0.76 r270; Top Overlay "3V3" at 74.597,65.507 h1.17 r270; Top Overlay "RESET" at 77.013,65.507 h1.17 r270; Top Overlay "RX" at 46.253,32.233 h1.17 r270; Top Overlay "TX" at 48.92,32.233 h1.17 r270; Top Overlay "GND" at 83.464,30.455 h1.17 r270; Top Overlay "AREF" at 86.004,31.598 h1.17 r270; Top Overlay "A0" at 59.461,65.507 h0.76 r270; Top Overlay "5V" at 71.78,65.507 h1.17 r270